# Altium PCB 75200_power.PcbDoc
Units mm, origin at the board's own origin, x right, y up, seen from the top; angles counter-clockwise.
Board outline 92 x 74 mm, 2 copper layers (Top Layer, Bottom Layer); 48 components, 22 nets, 193 pads, 0 vias.
Unrouted connection lines stored in the file: 8.
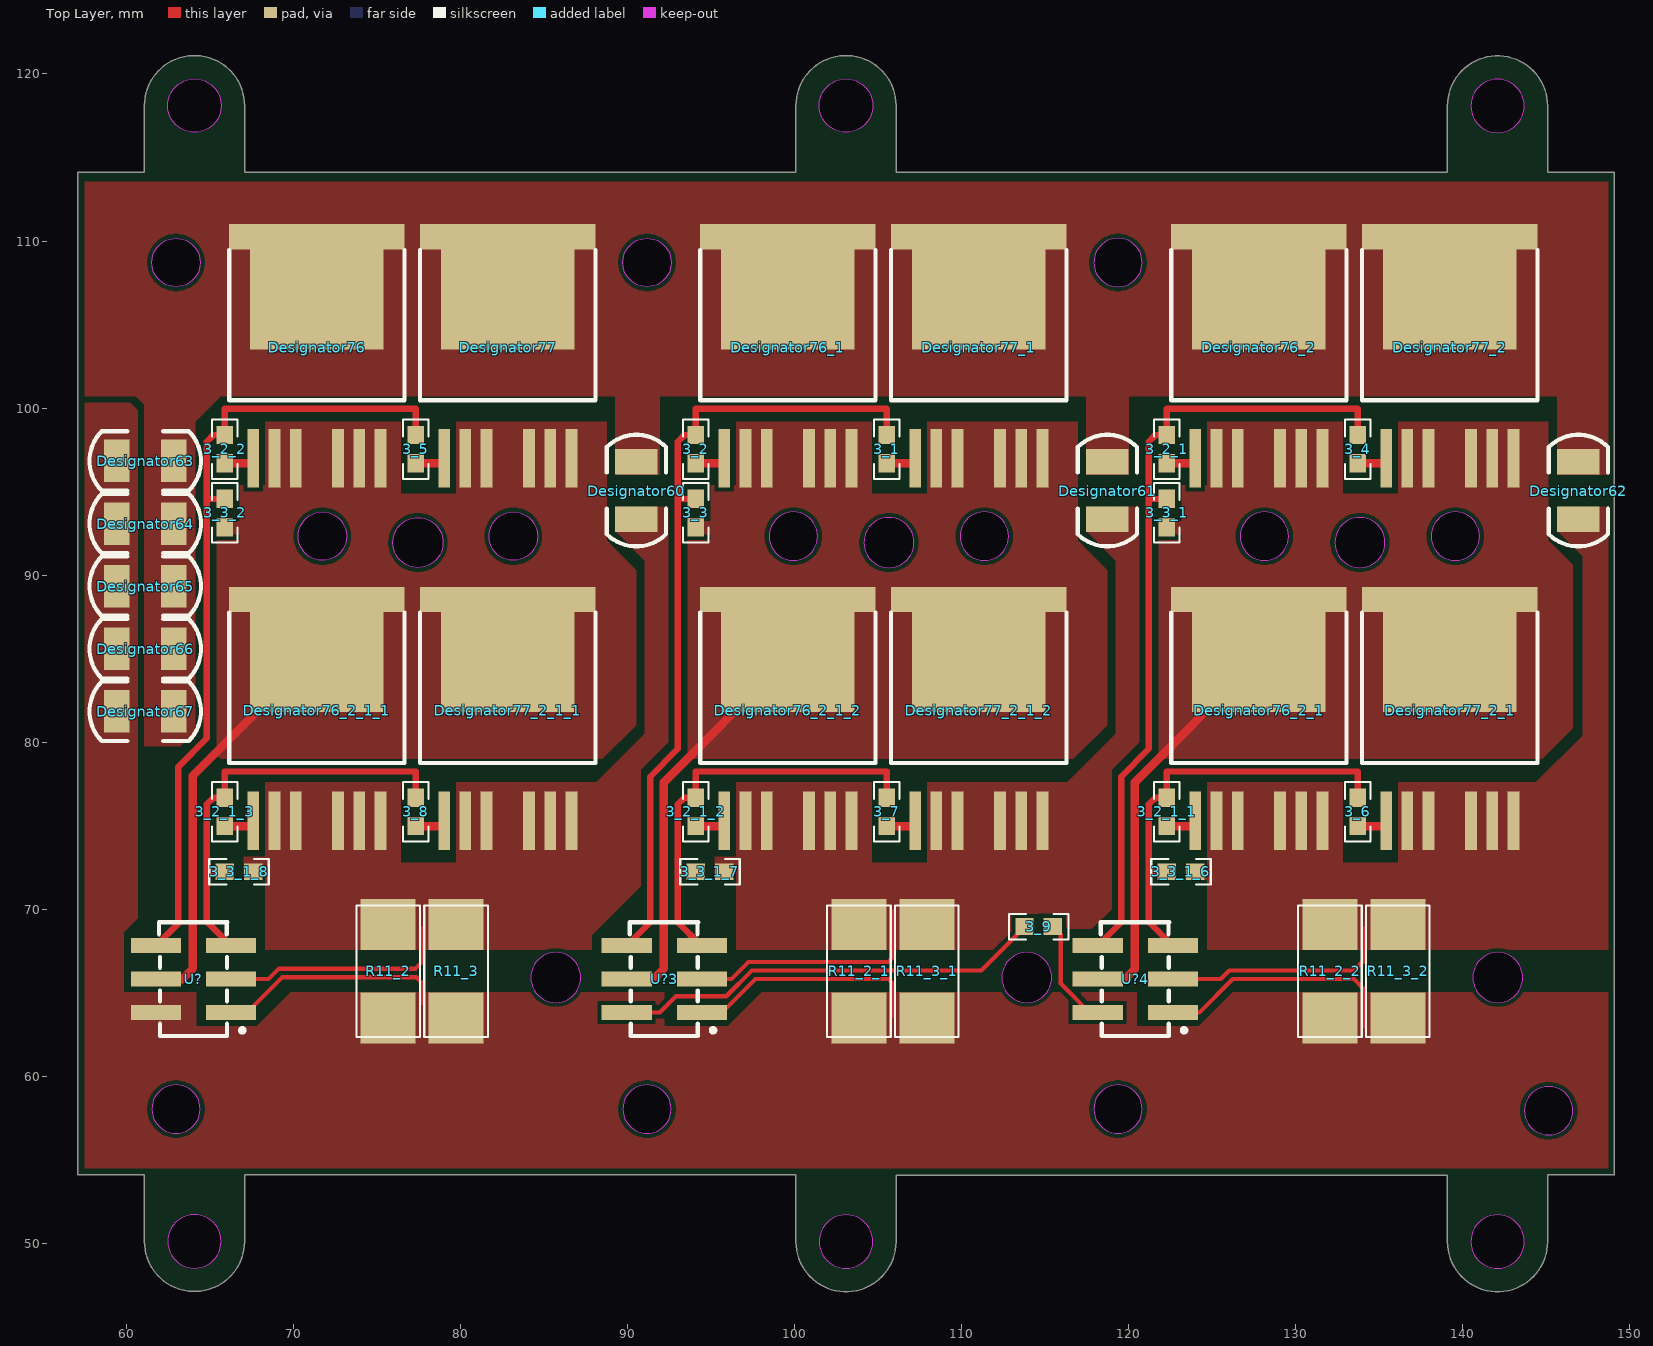
[diagram p0: Top Layer view]
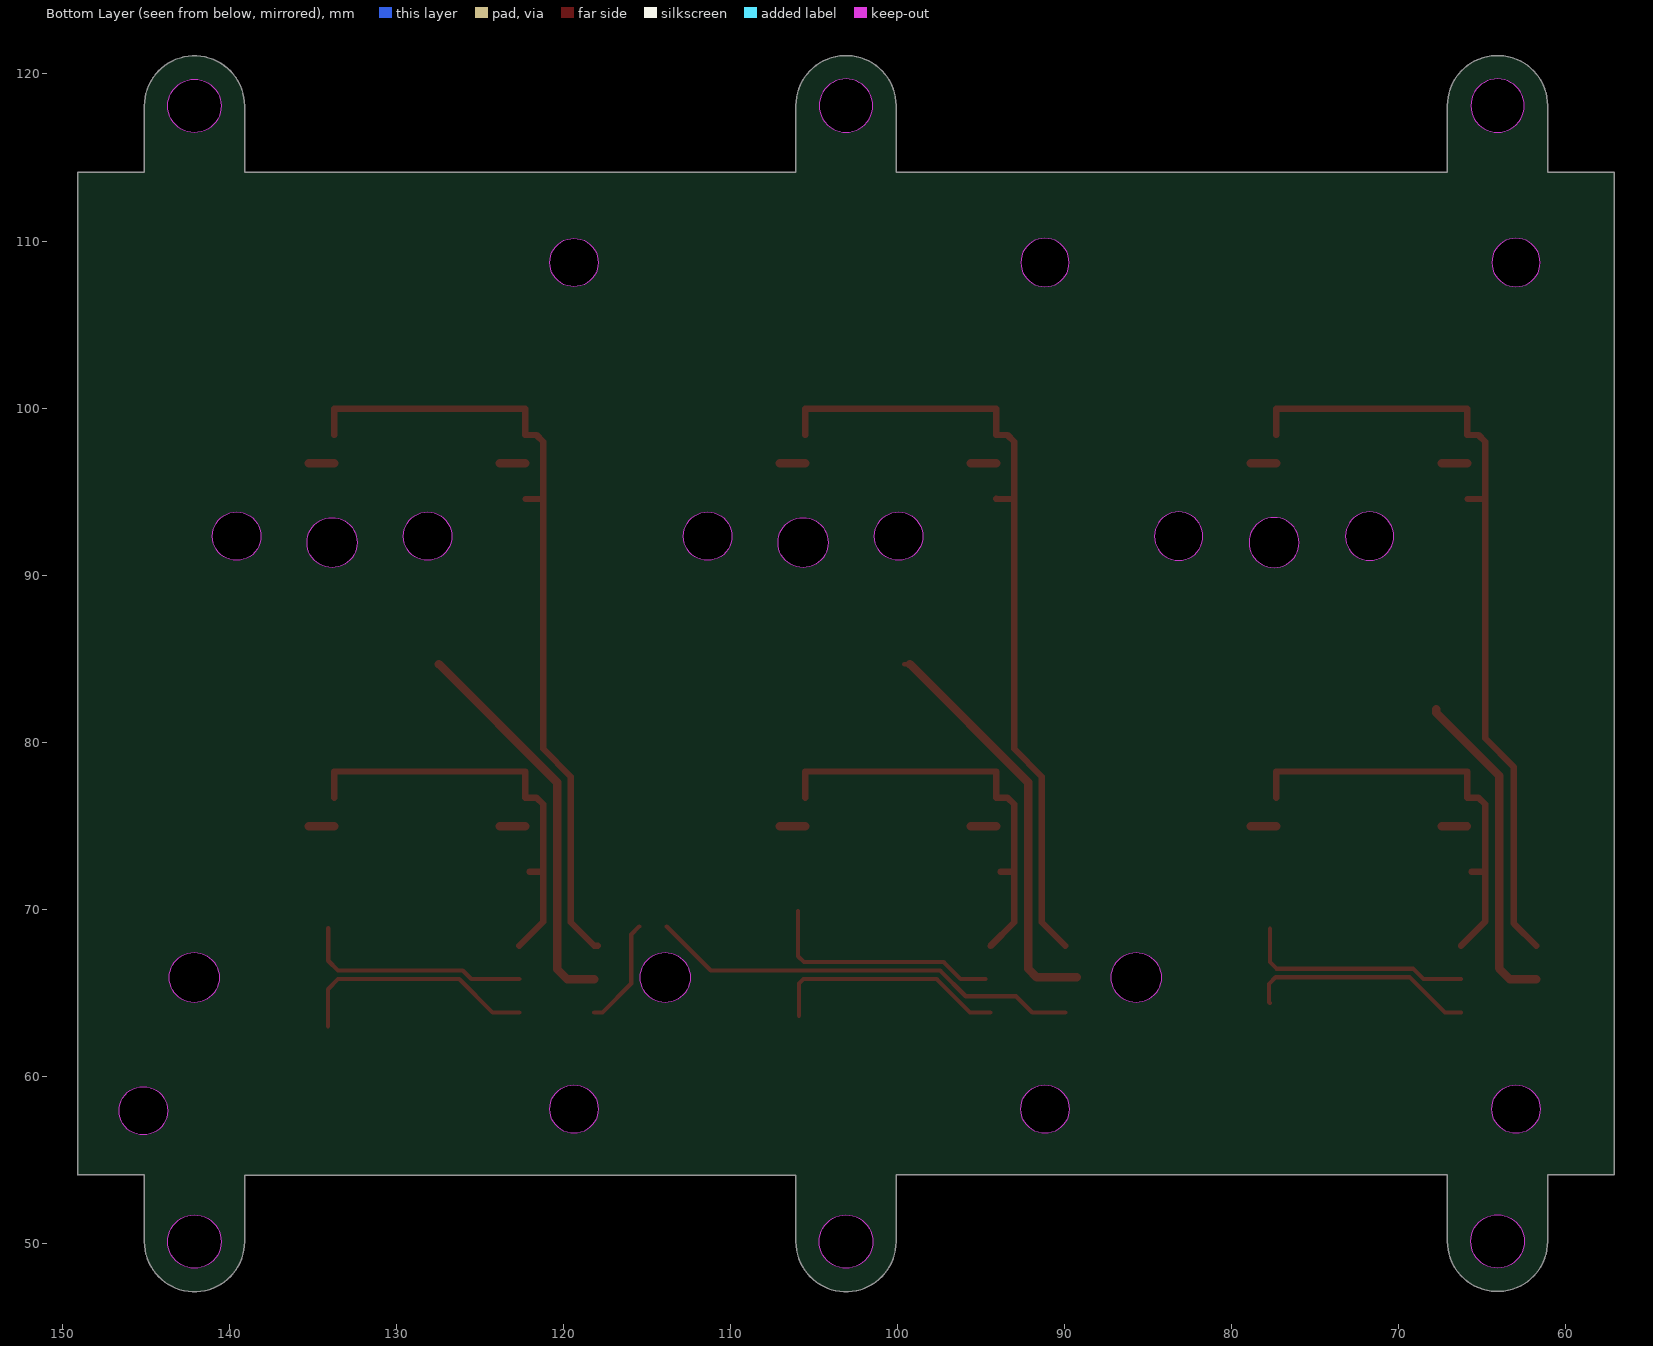
[diagram p1: Bottom Layer view, seen from below]
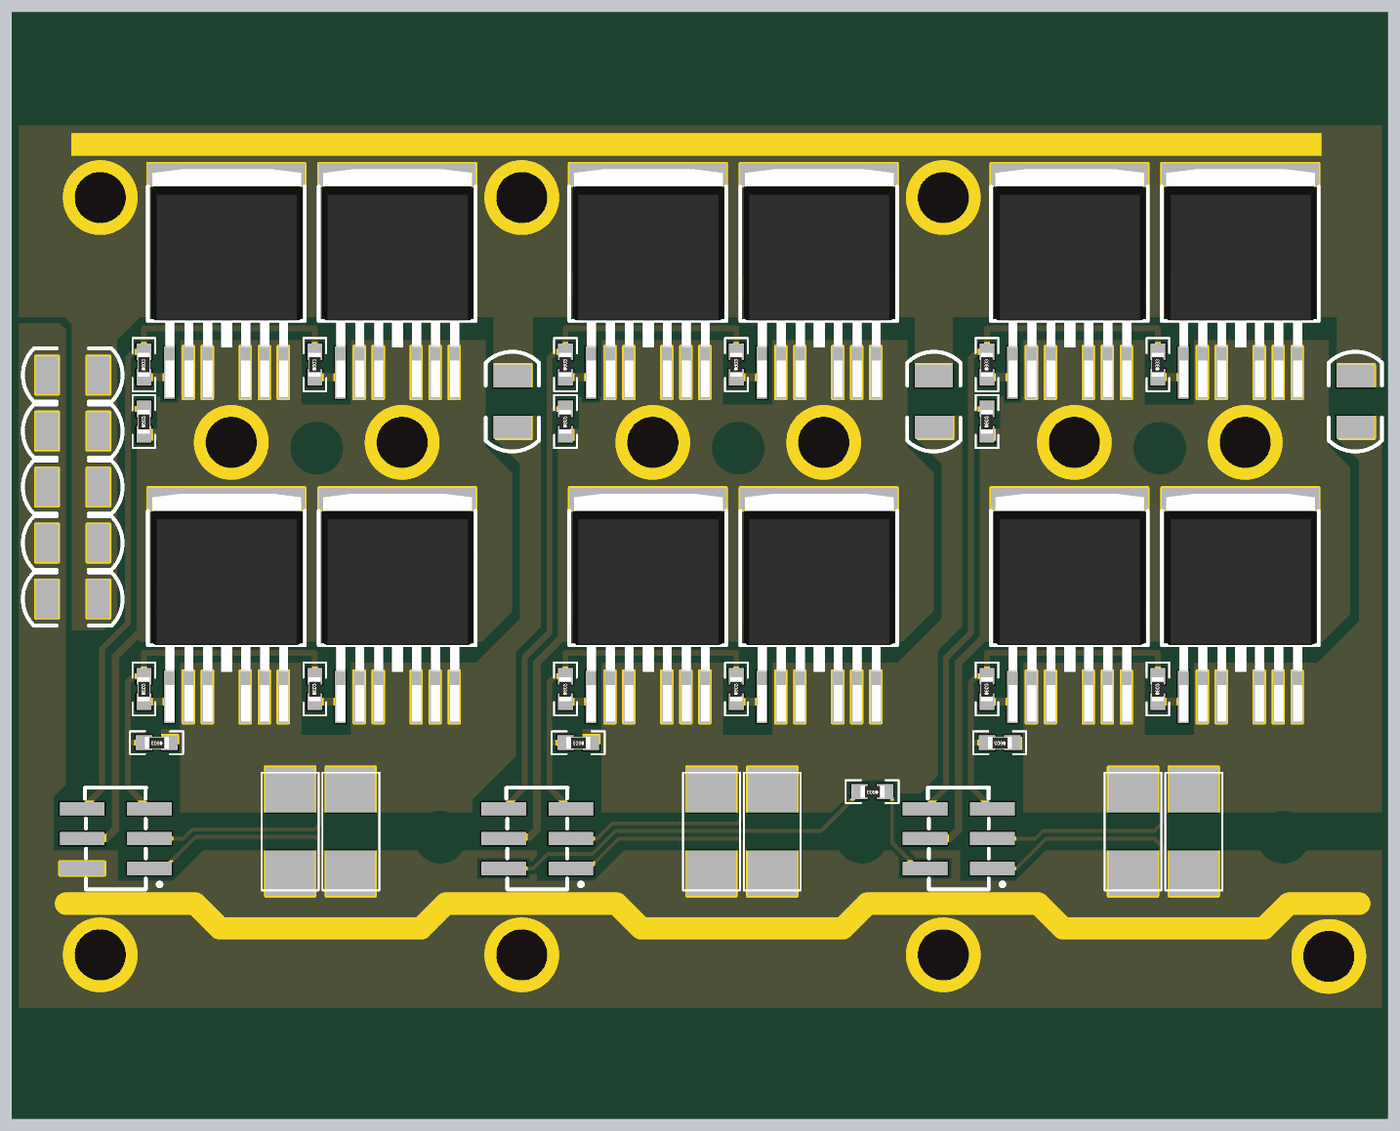
[diagram p2: 3D render of the assembled board from above, using the file's embedded part models]

## Layer stack, top to bottom
Top Solder: solder mask 0.0102, Solder Resist, Dk 3.5
Top Layer: signal copper 0.0356
Dielectric 1: dielectric 0.32, FR-4, Dk 4.8
Bottom Layer: signal copper 0.0356
Bottom Solder: solder mask 0.0102, Solder Resist, Dk 3.5

## Board outline
57.098,54.102 61.098,54.102 61.098,50.119 ccw(c64.098,50.119) 67.098,50.119 67.098,54.102 100.098,54.102 100.098,50.102 ccw(c103.098,50.102) 106.098,50.102 106.098,54.085 139.098,54.085 139.098,50.102 ccw(c142.098,50.102) 145.098,50.102 145.098,54.102 149.098,54.102 149.098,114.102 145.098,114.102 145.098,118.085 ccw(c142.098,118.085) 139.098,118.085 139.098,114.102 106.098,114.102 106.098,118.102 ccw(c103.098,118.102) 100.098,118.102 100.098,114.119 67.098,114.119 67.098,118.102 ccw(c64.098,118.102) 61.098,118.102 61.098,114.102 57.098,114.102
cut-out: 140.498,50.102 ccw(c142.098,50.102) 142.098,48.502 ccw(c142.098,50.102) 143.698,50.102 ccw(c142.098,50.102) 142.098,51.702 ccw(c142.098,50.102)
cut-out: 101.498,50.102 ccw(c103.098,50.102) 103.098,48.502 ccw(c103.098,50.102) 104.698,50.102 ccw(c103.098,50.102) 103.098,51.702 ccw(c103.098,50.102)
cut-out: 62.498,50.119 ccw(c64.098,50.119) 64.098,48.519 ccw(c64.098,50.119) 65.698,50.119 ccw(c64.098,50.119) 64.098,51.719 ccw(c64.098,50.119)
cut-out: 89.736,58.039 ccw(c91.186,58.039) 91.186,56.589 ccw(c91.186,58.039) 92.636,58.039 ccw(c91.186,58.039) 91.186,59.489 ccw(c91.186,58.039)
cut-out: 117.93,58.039 ccw(c119.38,58.039) 119.38,56.589 ccw(c119.38,58.039) 120.83,58.039 ccw(c119.38,58.039) 119.38,59.489 ccw(c119.38,58.039)
cut-out: 143.711,57.937 ccw(c145.161,57.937) 145.161,56.487 ccw(c145.161,57.937) 146.611,57.937 ccw(c145.161,57.937) 145.161,59.387 ccw(c145.161,57.937)
cut-out: 61.542,58.039 ccw(c62.992,58.039) 62.992,56.589 ccw(c62.992,58.039) 64.442,58.039 ccw(c62.992,58.039) 62.992,59.489 ccw(c62.992,58.039)
cut-out: 138.123,92.329 ccw(c139.573,92.329) 139.573,90.879 ccw(c139.573,92.329) 141.023,92.329 ccw(c139.573,92.329) 139.573,93.779 ccw(c139.573,92.329)
cut-out: 126.693,92.329 ccw(c128.143,92.329) 128.143,90.879 ccw(c128.143,92.329) 129.593,92.329 ccw(c128.143,92.329) 128.143,93.779 ccw(c128.143,92.329)
cut-out: 109.929,92.329 ccw(c111.379,92.329) 111.379,90.879 ccw(c111.379,92.329) 112.829,92.329 ccw(c111.379,92.329) 111.379,93.779 ccw(c111.379,92.329)
cut-out: 98.499,92.329 ccw(c99.949,92.329) 99.949,90.879 ccw(c99.949,92.329) 101.399,92.329 ccw(c99.949,92.329) 99.949,93.779 ccw(c99.949,92.329)
cut-out: 83.185,90.879 cw(c83.185,92.329) 81.735,92.329 cw(c83.185,92.329) 83.185,93.779 cw(c83.185,92.329) 84.635,92.329 cw(c83.185,92.329)
cut-out: 71.755,90.879 cw(c71.755,92.329) 70.305,92.329 cw(c71.755,92.329) 71.755,93.779 cw(c71.755,92.329) 73.205,92.329 cw(c71.755,92.329)
cut-out: 62.992,107.262 cw(c62.992,108.712) 61.542,108.712 cw(c62.992,108.712) 62.992,110.162 cw(c62.992,108.712) 64.442,108.712 cw(c62.992,108.712)
cut-out: 91.186,107.262 cw(c91.186,108.712) 89.736,108.712 cw(c91.186,108.712) 91.186,110.162 cw(c91.186,108.712) 92.636,108.712 cw(c91.186,108.712)
cut-out: 117.93,108.712 ccw(c119.38,108.712) 119.38,107.262 ccw(c119.38,108.712) 120.83,108.712 ccw(c119.38,108.712) 119.38,110.162 ccw(c119.38,108.712)
cut-out: 77.47,90.448 cw(c77.47,91.948) 75.97,91.948 cw(c77.47,91.948) 77.47,93.448 cw(c77.47,91.948) 78.97,91.948 cw(c77.47,91.948)
cut-out: 104.164,91.948 ccw(c105.664,91.948) 105.664,90.448 ccw(c105.664,91.948) 107.164,91.948 ccw(c105.664,91.948) 105.664,93.448 ccw(c105.664,91.948)
cut-out: 132.358,91.948 ccw(c133.858,91.948) 133.858,90.448 ccw(c133.858,91.948) 135.358,91.948 ccw(c133.858,91.948) 133.858,93.448 ccw(c133.858,91.948)
cut-out: 84.225,65.913 ccw(c85.725,65.913) 85.725,64.413 ccw(c85.725,65.913) 87.225,65.913 ccw(c85.725,65.913) 85.725,67.413 ccw(c85.725,65.913)
cut-out: 140.613,65.913 ccw(c142.113,65.913) 142.113,64.413 ccw(c142.113,65.913) 143.613,65.913 ccw(c142.113,65.913) 142.113,67.413 ccw(c142.113,65.913)
cut-out: 112.419,65.913 ccw(c113.919,65.913) 113.919,64.413 ccw(c113.919,65.913) 115.419,65.913 ccw(c113.919,65.913) 113.919,67.413 ccw(c113.919,65.913)
cut-out: 140.498,118.085 ccw(c142.098,118.085) 142.098,116.485 ccw(c142.098,118.085) 143.698,118.085 ccw(c142.098,118.085) 142.098,119.685 ccw(c142.098,118.085)
cut-out: 103.098,116.502 cw(c103.098,118.102) 101.498,118.102 cw(c103.098,118.102) 103.098,119.702 cw(c103.098,118.102) 104.698,118.102 cw(c103.098,118.102)
cut-out: 64.098,116.502 cw(c64.098,118.102) 62.498,118.102 cw(c64.098,118.102) 64.098,119.702 cw(c64.098,118.102) 65.698,118.102 cw(c64.098,118.102)

## Design rules (kind name [scope] priority, off if disabled: settings)
Clearance [All] p1: gap=0.254 ignorepadtopadclearanceinfootprint=FALSE
ComponentClearance [All] p1: gap=-2.54 collisioncheckmode=3 verticalgap=2540 showdistances=FALSE
PlaneConnect [All] p1: planeconnectstyle=Direct reliefexpansion=0.508 reliefentries=4 reliefconductorwidth=0.254 reliefairgap=0.254
PolygonConnect [All] p1: connectstyle=Direct reliefconductorwidth=0.254 reliefentries=4 polygonreliefangle="90 Angle" airgapwidth=0.254
RoutingVias [All] p1: holewidth=0.711 width=1.27 viastyle="Through Hole" minholewidth=0.711 minwidth=1.27 maxholewidth=0.711 maxwidth=1.27
SolderMaskExpansion [All] p1: expansion=0.102
Width [All] p1: maxlimit=2.54 minlimit=0.152 preferedwidth=0.254
28 further rules are at their usual default settings.

## Components (designator, comment, footprint, x,y, rotation, side; value= is the part's Value field where it differs from the comment)
3_1 "jb" 0603R 105.537,97.536 r90 top
3_2 "jb" 0603R 94.107,97.536 r90 top
3_2_1 "jb" 0603R 122.301,97.536 r90 top
3_2_1_1 "jb" 0603R 122.301,75.831 r90 top
3_2_1_2 "jb" 0603R 94.107,75.831 r90 top
3_2_1_3 "jb" 0603R 65.913,75.831 r90 top
3_2_2 "jb" 0603R 65.913,97.536 r90 top
3_3 "jb" 0603R 94.107,93.726 r90 top
3_3_1 "jb" 0603R 122.301,93.726 r90 top
3_3_1_6 "jb" 0603R 123.151,72.236 r180 top
3_3_1_7 "jb" 0603R 94.957,72.236 r180 top
3_3_1_8 "jb" 0603R 66.763,72.236 r180 top
3_3_2 "jb" 0603R 65.913,93.726 r90 top
3_4 "jb" 0603R 133.731,97.536 r90 top
3_5 "jb" 0603R 77.343,97.536 r90 top
3_6 "jb" 0603R 133.731,75.831 r90 top
3_7 "jb" 0603R 105.537,75.831 r90 top
3_8 "jb" 0603R 77.343,75.831 r90 top
3_9 "jb" 0603R 114.63,68.961 r180 top
Designator60 "Comment" 1210C 90.932,93.726 r90 top
Designator61 "Comment" 1210C 119.126,93.726 r90 top
Designator62 "Comment" 1210C 147.32,93.726 r90 top
Designator63 "Comment" 1210C 62.484,97.215 r180 top
Designator64 "Comment" 1210C 62.484,93.468 r180 top
Designator65 "Comment" 1210C 62.484,89.722 r180 top
Designator66 "Comment" 1210C 62.484,85.975 r180 top
Designator67 "Comment" 1210C 62.484,82.229 r180 top
Designator76 "Comment" TO-263-7p 74.504,99.429 r0 top
Designator76_1 "Comment" TO-263-7p 102.698,99.429 r0 top
Designator76_2 "Comment" TO-263-7p 130.892,99.429 r0 top
Designator76_2_1 "Comment" TO-263-7p 130.892,77.724 r0 top
Designator76_2_1_1 "Comment" TO-263-7p 74.504,77.724 r0 top
Designator76_2_1_2 "Comment" TO-263-7p 102.698,77.724 r0 top
Designator77 "Comment" TO-263-7p 85.934,99.429 r0 top
Designator77_1 "Comment" TO-263-7p 114.128,99.429 r0 top
Designator77_2 "Comment" TO-263-7p 142.322,99.429 r0 top
Designator77_2_1 "Comment" TO-263-7p 142.322,77.724 r0 top
Designator77_2_1_1 "Comment" TO-263-7p 85.934,77.724 r0 top
Designator77_2_1_2 "Comment" TO-263-7p 114.128,77.724 r0 top
R11_2 "0.5mR" 2512 75.81,63.49 r0 top (schematic designator R11)
R11_2_1 "0.5mR" 2512 103.992,63.49 r0 top (schematic designator R11)
R11_2_2 "0.5mR" 2512 132.186,63.49 r0 top (schematic designator R11)
R11_3 "0.5mR" 2512 79.874,63.49 r0 top (schematic designator R11)
R11_3_1 "0.5mR" 2512 108.056,63.49 r0 top (schematic designator R11)
R11_3_2 "0.5mR" 2512 136.25,63.49 r0 top (schematic designator R11)
U? "HDR-SMD_6P-P2.00-V-F-R2-C3-LS6.5" HDR-SMD_6P-P2.00-V-F-R2-C3-LS6.5 64.053,65.804 r90 top
U?3 "HDR-SMD_6P-P2.00-V-F-R2-C3-LS6.5" HDR-SMD_6P-P2.00-V-F-R2-C3-LS6.5 92.235,65.804 r90 top (schematic designator U?)
U?4 "HDR-SMD_6P-P2.00-V-F-R2-C3-LS6.5" HDR-SMD_6P-P2.00-V-F-R2-C3-LS6.5 120.429,65.804 r90 top (schematic designator U?)

## Footprints (in the part's own frame and the unit in brackets; to place one, negate y for a bottom-side part, rotate by r counter-clockwise, add the part's x,y. Pads: shape width x height; smd on the part's side, far side on the other; paste and mask are expansions set on the pad)
0603R [mm] "Chip Resistor; Body 1.6 x 0.8 mm (LxW typ)"
  rect 1.1x1 smd: 1(-0.85,0) 2(0.85,0)
  silkscreen extent -1.78,-0.76 1.78,0.76, body extent -0.82,-0.4 0.78,0.42, height 0.65
1210C [mil]
  rect 60x100 smd: 1(-15,15) 2(120,15)
  silkscreen extent -79,-55 184,85
2512 [mil]
  rect 130x120 smd: 1(-4.65,0.4) 2(-4.65,220.4)
  silkscreen extent -80,-45 70,265
HDR-SMD_6P-P2.00-V-F-R2-C3-LS6.5 [mm]
  rect 0.89x3 smd: 1(-1.985,-2.235) 2(-1.985,2.265) 3(0.015,-2.235) 4(0.015,2.265) 5(2.015,-2.235) 6(2.015,2.265)
  silkscreen extent -3.39,-3.03 3.42,2.09
TO-263-7p [mm]
  rect 0.7x3.5 smd: 1(-6.89,-2.423) 2(-5.62,-2.423) 3(-4.35,-2.423) 5(-1.81,-2.423) 6(-0.54,-2.423) 7(0.73,-2.423)
  rect 8x7.5 smd: 4(-3.08,7.827)
  rect 10.5x1.5 smd: 4(-3.08,10.827)
  silkscreen extent -8.33,1.03 2.17,10.03, body extent -8.13,-4.07 2.03,11.18, height 4.46

## Part data
R11_2 R11_2_1 R11_2_2 R11_3 R11_3_1 R11_3_2: library part Res2, "Resistor"

## Free pads (board coordinates)
  round 5 on Top Solder: 3(62.992,58.039) 3(62.992,108.712) 3(71.755,92.329) 3(83.185,92.329) 3(91.186,58.039) 3(91.186,108.712) 3(99.949,92.329) 3(111.379,92.329) 3(119.38,58.039) 3(119.38,108.712) 3(128.143,92.329) 3(139.573,92.329) 3(145.161,57.937)

## Nets (pads, with @x,y where several pads share a name; then routed paths per layer and width w, separated by ;. In a path a pad name is that pad's centre, name@x,y a point inside that pad or via, vN(x,y) a via of type N, cw(c..) or ccw(c..) an arc to the next point about the centre after c; other vN are vias at no path point)
GND: Designator63.2 Designator64.2 Designator65.2 Designator66.2 Designator67.2 R11_2.1 R11_2_1.1 R11_2_2.1 R11_3.1 R11_3_1.1 R11_3_2.1 U?3.1 U?4.1 U?.1 U?.2 | length 42.7
  Top Layer w0.254: U?.1 67.248,63.819 69.363,65.934 77.369,65.934 77.772,65.531 77.772,64.437 77.724,64.389 ; U?3.1 95.673,63.819 97.673,65.819 105.646,65.819 105.918,65.547 105.918,63.627 ; U?4.1 124.248,63.819 126.248,65.819 133.5,65.819 134.112,65.207 134.112,62.992
SU: 3_3_1_8.1 Designator60.1 Designator76_2_1_1.2 Designator76_2_1_1.3 Designator76_2_1_1.5 Designator76_2_1_1.6 Designator76_2_1_1.7 Designator77_2_1_1.2 Designator77_2_1_1.3 Designator77_2_1_1.5 Designator77_2_1_1.6 Designator77_2_1_1.7 R11_2.2 R11_3.2 U?.3 | length 13.9
  Top Layer w0.254: U?.3 68.53,65.819 69.152,66.442 77.329,66.442 77.724,66.837 77.724,68.834
SV: 3_3_1_7.1 Designator61.1 Designator76_2_1_2.2 Designator76_2_1_2.3 Designator76_2_1_2.5 Designator76_2_1_2.6 Designator76_2_1_2.7 Designator77_2_1_2.2 Designator77_2_1_2.3 Designator77_2_1_2.5 Designator77_2_1_2.6 Designator77_2_1_2.7 R11_2_1.2 R11_3_1.2 U?3.3 | length 14.5
  Top Layer w0.254: U?3.3@94.742,65.819 96.236,65.819 97.252,66.835 105.612,66.835 105.966,67.189 105.966,69.898
SW: 3_3_1_6.1 Designator62.1 Designator76_2_1.2 Designator76_2_1.3 Designator76_2_1.5 Designator76_2_1.6 Designator76_2_1.7 Designator77_2_1.2 Designator77_2_1.3 Designator77_2_1.5 Designator77_2_1.6 Designator77_2_1.7 R11_2_2.2 R11_3_2.2 U?4.3 | length 13.8
  Top Layer w0.254: U?4.3 125.53,65.819 126.038,66.327 133.5,66.327 134.086,66.914 134.086,68.867
TMP1: 3_9.2 U?3.2 | length 26
  Top Layer w0.254: U?3.2 91.949,63.819 92.925,64.795 95.93,64.795 97.462,66.327 111.193,66.327 3_9.2@113.827,68.961
TMP2: 3_9.1 U?4.2 | length 6.5
  Top Layer w0.254: 3_9.1 115.951,68.49 115.951,65.548 117.681,63.819 U?4.2
U: 3_3_2.1 Designator76.2 Designator76.3 Designator76.5 Designator76.6 Designator76.7 Designator76_2_1_1.4 Designator77.2 Designator77.3 Designator77.5 Designator77.6 Designator77.7 Designator77_2_1_1.4 U?.4 | length 19.6
  Top Layer w0.508: U?.4 63.371,65.819 64.008,66.456 64.008,78.002 67.754,81.749 Designator76_2_1_1.4@67.754,81.978
UH: 3_2_2.1 3_5.1 Designator76.1 Designator77.1 | length 3
  Top Layer w0.508: 3_2_2.1 Designator76.1@67.437,96.686 ; 3_5.1 Designator77.1@78.867,96.686
UHH: 3_2_2.2 3_3_2.2 3_5.2 U?.6 | length 48.3
  Top Layer w0.381: U?.6 63.119,69.15 63.119,78.51 64.841,80.233 64.841,94.559 ; 3_3_2.2@65.896,94.559 64.841,94.559 ; 3_5.2 77.343,99.949 65.913,99.949 3_2_2.2 65.239,98.386 64.841,97.988 64.841,94.559
UL: 3_2_1_3.1 3_8.1 Designator76_2_1_1.1 Designator77_2_1_1.1 | length 3
  Top Layer w0.508: 3_2_1_3.1@65.925,74.981 Designator76_2_1_1.1@67.449,74.981 ; 3_8.1 Designator77_2_1_1.1@78.867,74.981
ULL: 3_2_1_3.2 3_3_1_8.2 3_8.2 U?.5 | length 25.7
  Top Layer w0.381: 3_3_1_8.2@65.659,72.236 64.841,72.236 ; U?.5 64.841,69.265 64.841,72.236 ; 3_8.2 77.343,78.244 65.913,78.244 3_2_1_3.2 65.239,76.681 64.841,76.283 64.841,72.236
V: 3_3.1 Designator76_1.2 Designator76_1.3 Designator76_1.5 Designator76_1.6 Designator76_1.7 Designator76_2_1_2.4 Designator77_1.2 Designator77_1.3 Designator77_1.5 Designator77_1.6 Designator77_1.7 Designator77_2_1_2.4 U?3.4 | length 24.6
  Top Layer w0.254: Designator76_2_1_2.4@99.275,84.67 Designator76_2_1_2.4@99.618,84.67
  Top Layer w0.508: U?3.4@89.289,65.921 91.681,65.921 92.202,66.442 92.202,77.597 Designator76_2_1_2.4@99.275,84.67
VBAT: Designator60.2 Designator61.2 Designator62.2 Designator63.1 Designator64.1 Designator65.1 Designator66.1 Designator67.1 Designator76.4 Designator76_1.4 Designator76_2.4 Designator77.4 Designator77_1.4 Designator77_2.4
VH: 3_1.1 3_2.1 Designator76_1.1 Designator77_1.1 | length 3
  Top Layer w0.508: 3_2.1 Designator76_1.1@95.631,96.686 ; 3_1.1 Designator77_1.1@107.061,96.686
VHH: 3_1.2 3_2.2 3_3.2 U?3.6 | length 48.3
  Top Layer w0.381: U?3.6 91.376,69.225 91.376,77.939 93.035,79.598 93.035,94.559 ; 3_3.2 94.09,94.559 93.035,94.559 ; 3_1.2 105.537,99.949 94.107,99.949 3_2.2 93.433,98.386 93.035,97.988 93.035,94.559
VL: 3_2_1_2.1 3_7.1 Designator76_2_1_2.1 Designator77_2_1_2.1 | length 3
  Top Layer w0.508: 3_2_1_2.1 Designator76_2_1_2.1@95.631,74.981 ; 3_7.1 Designator77_2_1_2.1@107.061,74.981
VLL: 3_2_1_2.2 3_3_1_7.2 3_7.2 U?3.5 | length 25.7
  Top Layer w0.381: 3_3_1_7.2@93.853,72.236 93.035,72.236 ; U?3.5@94.45,67.799 93.035,69.213 93.035,72.236 ; 3_7.2 105.537,78.244 94.107,78.244 3_2_1_2.2 93.433,76.681 93.035,76.283 93.035,72.236
W: 3_3_1.1 Designator76_2.2 Designator76_2.3 Designator76_2.5 Designator76_2.6 Designator76_2.7 Designator76_2_1.4 Designator77_2.2 Designator77_2.3 Designator77_2.5 Designator77_2.6 Designator77_2.7 Designator77_2_1.4 U?4.4 | length 23.7
  Top Layer w0.508: U?4.4 119.794,65.819 120.396,66.421 120.396,77.597 Designator76_2_1.4@127.469,84.67
WH: 3_2_1.1 3_4.1 Designator76_2.1 Designator77_2.1 | length 3
  Top Layer w0.508: 3_2_1.1 Designator76_2.1@123.825,96.686 ; 3_4.1 Designator77_2.1@135.255,96.686
WHH: 3_2_1.2 3_3_1.2 3_4.2 U?4.6 | length 48.5
  Top Layer w0.381: U?4.6@117.958,67.823 118.169,67.823 119.57,69.225 119.57,77.939 121.229,79.598 121.229,94.559 ; 3_3_1.2@122.284,94.559 121.229,94.559 ; 3_4.2 133.731,99.949 122.301,99.949 3_2_1.2 121.627,98.386 121.229,97.988 121.229,94.559
WL: 3_2_1_1.1 3_6.1 Designator76_2_1.1 Designator77_2_1.1 | length 3
  Top Layer w0.508: 3_2_1_1.1 Designator76_2_1.1@123.825,74.981 ; 3_6.1 Designator77_2_1.1@135.255,74.981
WLL: 3_2_1_1.2 3_3_1_6.2 3_6.2 U?4.5 | length 25.7
  Top Layer w0.381: 3_3_1_6.2@122.047,72.236 121.229,72.236 ; U?4.5 121.229,69.254 121.229,72.236 ; 3_6.2 133.731,78.244 122.301,78.244 3_2_1_1.2 121.627,76.681 121.229,76.283 121.229,72.236

## Polygon pours and split planes (outlines as drawn)
W on Top Layer "Top Layer-U" (solid, pour order 44): 121.812,92.456 123.19,92.456 123.19,92.075 121.815,92.075 121.812,79.229 122.047,78.994 144.78,78.994 146.606,80.82 146.606,90.63 145.796,91.44 145.145,92.092 145.144,99.187 136.144,99.187 136.144,94.869 132.842,94.869 132.842,99.187 124.714,99.187 124.714,95.377 123.19,95.377 123.19,93.218 121.812,93.218
SW on Top Layer "Top Layer-SW" (solid, pour order 42): 147.193,91.127 145.669,92.646 145.669,94.107 147.006,94.107 148.717,94.107 148.717,67.564 124.714,67.564 124.714,71.755 123.444,71.755 123.444,72.644 124.714,72.644 124.714,77.597 132.842,77.597 132.842,72.771 136.144,72.771 136.144,77.597 144.399,77.597 147.193,80.391
V on Top Layer "Top Layer-U" (solid, pour order 40): 93.618,92.456 94.988,92.456 94.988,92.075 93.618,92.075 93.618,79.229 93.853,78.994 116.713,78.994 118.745,81.026 118.745,90.297 117.602,91.44 116.967,92.075 116.967,99.187 107.95,99.187 107.95,94.869 104.648,94.869 104.648,99.187 96.52,99.187 96.52,95.377 94.996,95.377 94.996,93.218 93.618,93.218
SV on Top Layer "Top Layer-SV" (solid, remove dead copper, pour order 38): 116.337,67.823 116.337,68.834 117.821,68.834 118.999,70.012 118.999,78.351 120.65,80.002 120.65,94.107 118.812,94.107 117.475,94.107 117.475,92.646 119.253,90.873 119.253,80.508 116.342,77.597 107.95,77.597 107.95,72.771 104.648,72.771 104.648,77.597 96.52,77.597 96.52,73.152 95.25,73.152 95.25,72.136 96.52,72.136 96.52,67.564 116.078,67.564
GND on Top Layer "Top Layer-GND" (solid, pour order 26): 64.198,65.024 64.198,62.992 67.818,62.992 69.85,65.024 92.211,65.024 92.211,62.992 96.012,62.992 98.044,65.024 99.618,65.024 120.506,65.024 120.506,62.992 124.206,62.992 126.238,65.024 148.717,65.024 148.717,54.483 57.531,54.483 57.531,100.33 60.229,100.33 60.252,100.33 60.706,99.876 60.706,69.446 59.875,68.615 59.875,65.024
VBAT on Top Layer "Top Layer-VBAT" (solid, pour order 24): 63.246,79.756 61.087,79.756 61.087,100.203 60.579,100.711 57.531,100.711 57.531,113.538 148.717,113.538 148.717,96.012 145.669,96.012 145.669,100.711 120.015,100.711 120.015,96.012 117.475,96.012 117.475,100.711 91.948,100.711 91.948,96.012 89.288,96.012 89.289,100.711 65.659,100.711 64.135,99.187 64.135,80.645
SU on Top Layer "Top Layer-SU" (solid, pour order 14): 91.059,90.873 89.281,92.646 89.281,94.107 90.618,94.107 92.456,94.107 92.456,80.002 90.805,78.351 90.805,71.366 87.884,68.445 87.884,67.564 68.326,67.564 68.326,72.136 67.056,72.136 67.056,73.152 68.326,73.152 68.326,77.597 76.454,77.597 76.454,72.771 79.756,72.771 79.756,77.597 88.148,77.597 91.059,80.508
U on Top Layer "Top Layer-U" (solid, pour order 12): 65.424,92.456 66.802,92.456 66.802,92.075 65.424,92.075 65.424,79.229 65.659,78.994 88.519,78.994 90.551,81.026 90.551,90.297 89.408,91.44 88.773,92.075 88.773,99.187 79.756,99.187 79.756,94.869 76.454,94.869 76.454,99.187 68.326,99.187 68.326,95.377 66.802,95.377 66.802,93.218 65.424,93.218
no net on Top Solder (solid): 144.678,113.03 61.039,113.03 61.039,111.506 144.678,111.506

## Silkscreen, mask and mechanical layers (free items; w line width, h text height)
Top Solder:
  lines w1.5: 60.706,61.468 69.342,61.468 70.993,59.817 84.455,59.817 86.106,61.468 97.536,61.468 99.187,59.817 112.649,59.817 114.3,61.468 117.221,61.468 125.73,61.468 127.381,59.817 140.843,59.817 142.494,61.468 147.193,61.468
Mechanical 1:
  circle w0.1: c103.098,50.102 r1.6
  circle w0.1: c142.098,50.102 r1.6
  circle w0.1: c64.098,50.119 r1.6
  circle w0.1: c91.186,58.039 r1.45
  circle w0.1: c119.38,58.039 r1.45
  circle w0.1: c145.161,57.937 r1.45
  circle w0.1: c62.992,58.039 r1.45
  circle w0.1: c139.573,92.329 r1.45
  circle w0.1: c128.143,92.329 r1.45
  circle w0.1: c111.379,92.329 r1.45
  circle w0.1: c99.949,92.329 r1.45
  circle w0.1: c83.185,92.329 r1.45
  circle w0.1: c71.755,92.329 r1.45
  circle w0.1: c62.992,108.712 r1.45
  circle w0.1: c91.186,108.712 r1.45
  circle w0.1: c119.38,108.712 r1.45
  circle w0.1: c85.725,65.913 r1.5
  circle w0.1: c142.113,65.913 r1.5
  circle w0.1: c142.098,118.085 r1.6
  circle w0.1: c64.098,118.102 r1.6
  circle w0.1: c103.098,118.102 r1.6
  circle w0.1: c113.919,65.913 r1.5
  circle w0.1: c77.47,91.948 r1.5
  circle w0.1: c105.664,91.948 r1.5
  circle w0.1: c133.858,91.948 r1.5
  lines w0.254: 100.098,54.085 100.098,50.102 ccw(c103.098,50.102) 106.098,50.102 106.098,54.085 139.098,54.085 139.098,50.102 ccw(c142.098,50.102) 145.098,50.102 145.098,54.102 149.098,54.102 149.098,114.102 145.098,114.102 145.098,118.085 ccw(c142.098,118.085) 139.098,118.085 139.098,114.102 106.098,114.102 ; 100.098,54.102 67.098,54.102 67.098,50.119 cw(c64.098,50.119) 61.098,50.119 61.098,54.102 57.098,54.102 57.098,114.102 61.098,114.102 61.098,118.102 cw(c64.098,118.102) 67.098,118.102 67.098,114.119 100.098,114.119 100.098,118.102 cw(c103.098,118.102) 106.098,118.102 106.098,114.119